# Altium PCB Top-Board_V1.pcbdoc
Units mm, origin at the board's own origin, x right, y up, seen from the top; angles counter-clockwise.
Board outline 90.4 x 70.9 mm, 2 copper layers (Top Layer, Bottom Layer); 20 components, 39 nets, 122 pads, 11 vias.
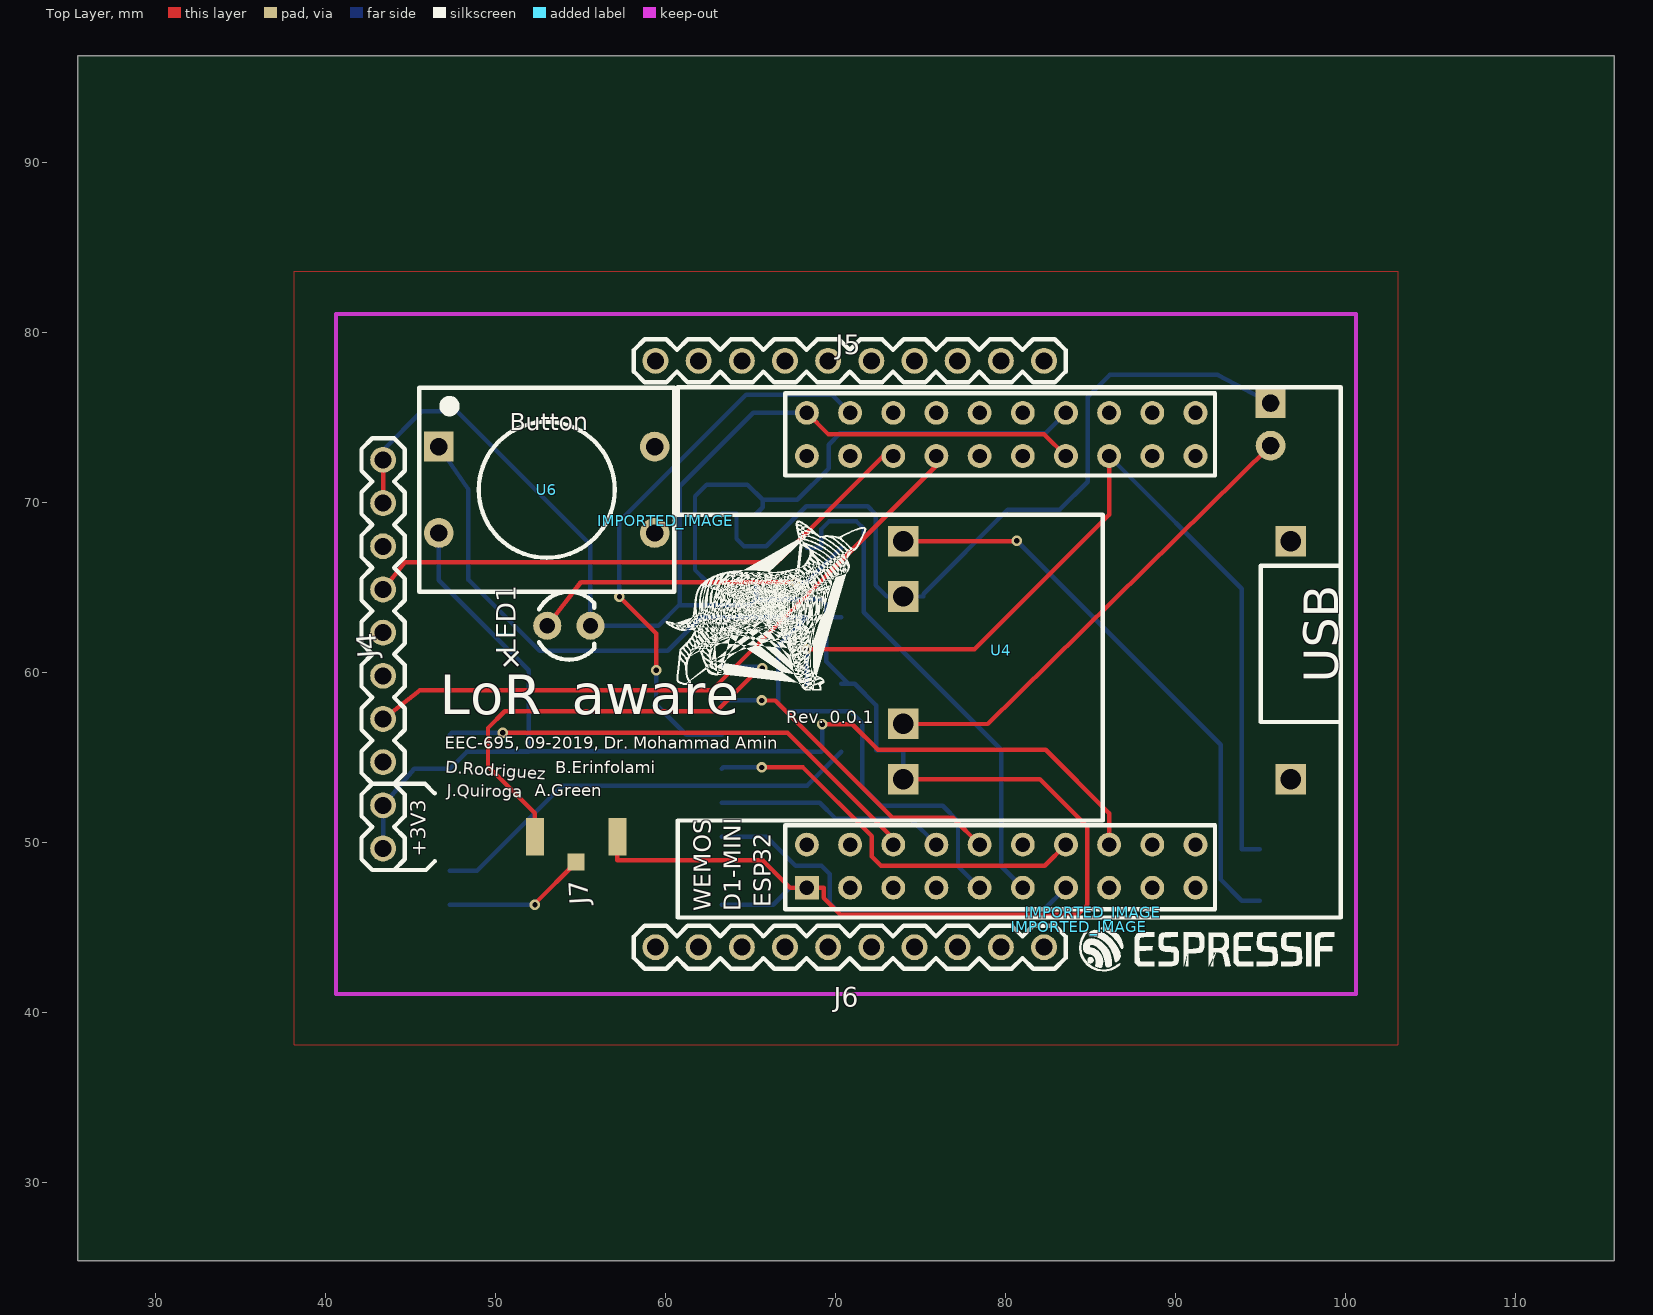
[diagram p0: Top Layer view]
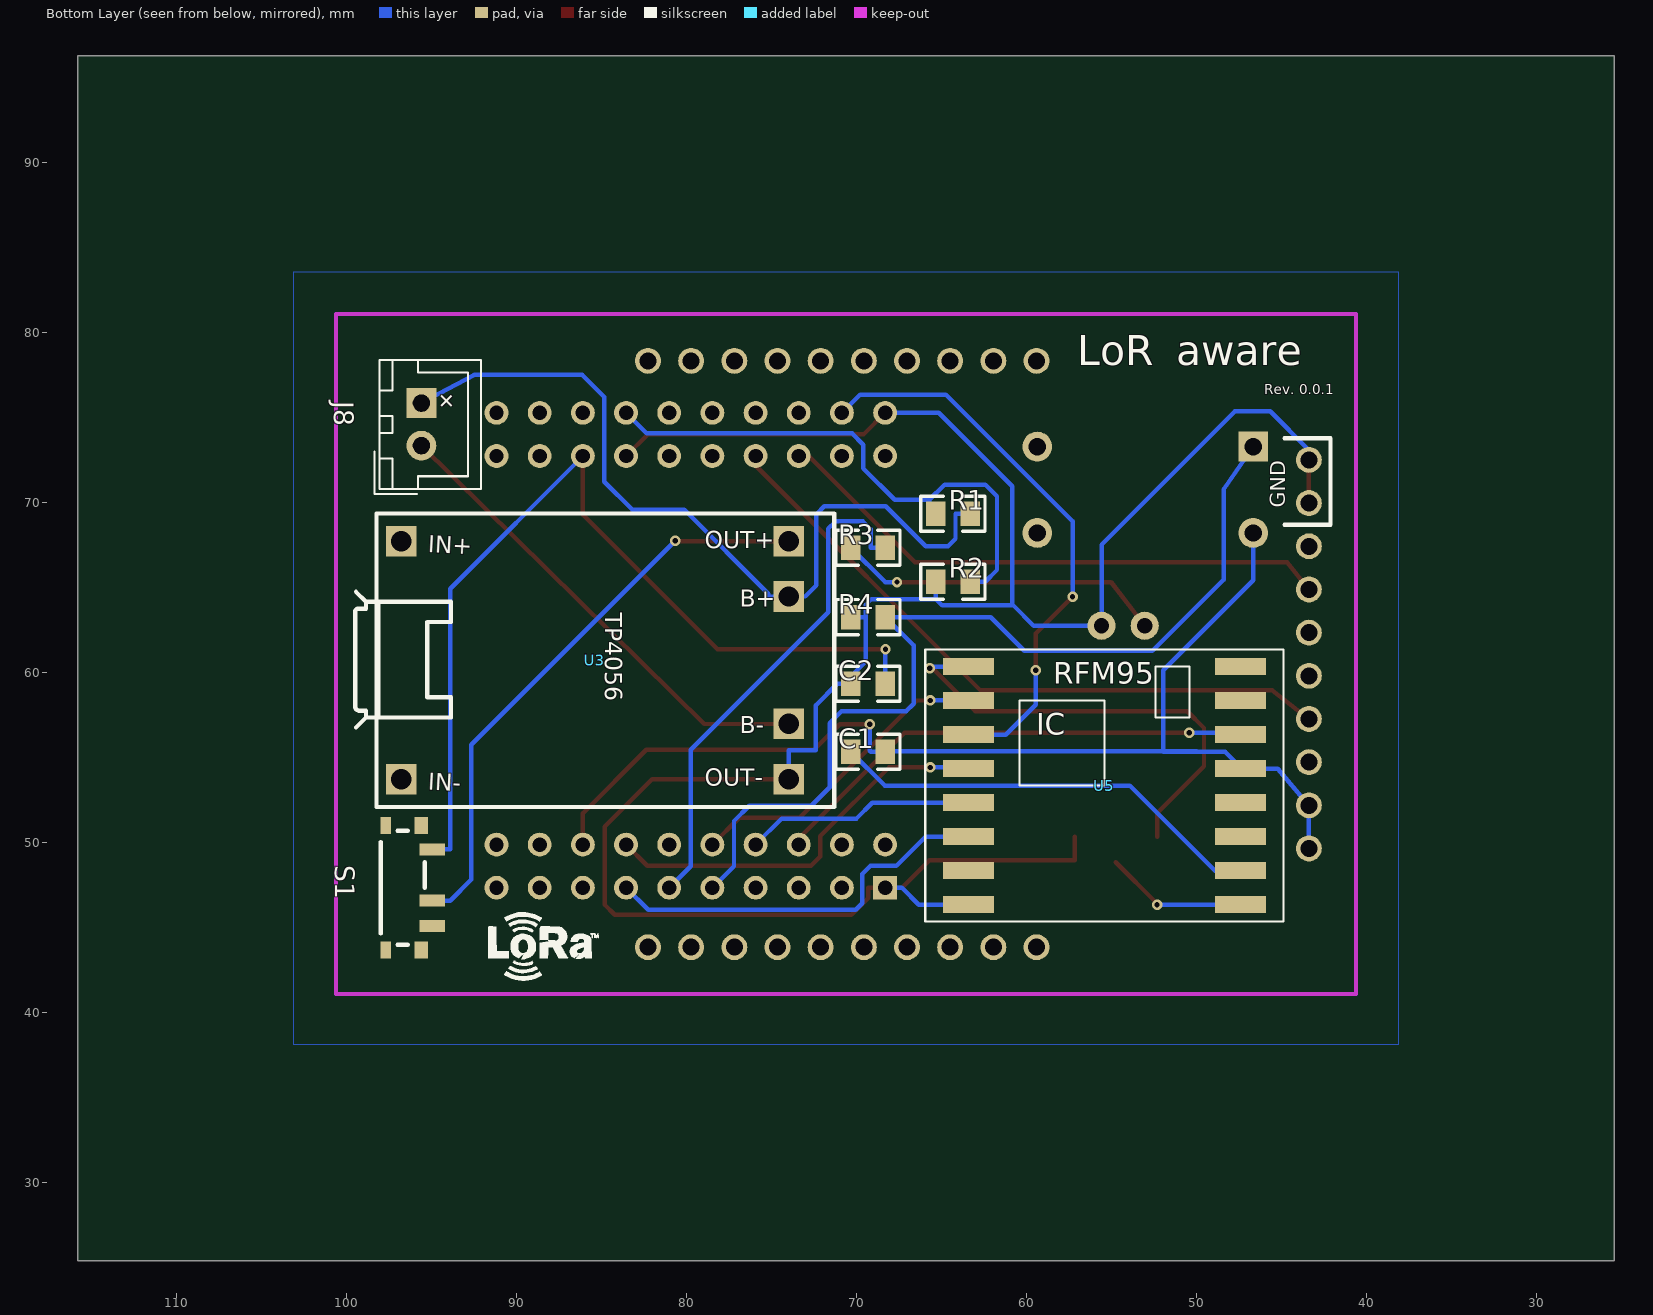
[diagram p1: Bottom Layer view, seen from below]

## Layer stack, top to bottom
Top Layer: signal copper (thickness not stored)
Dielectric: dielectric 0.32, FR-4, Dk 4.8
Bottom Layer: signal copper (thickness not stored)

## Board outline
115.8,25.4 25.4,25.4 25.4,96.3 115.8,96.3

## Components (designator, comment, footprint, x,y, rotation, side; value= is the part's Value field where it differs from the comment)
C1 "0.1u" 0805 69.3,55.35 r0 bottom
C2 "0.1u" 0805 69.3,59.35 r0 bottom
IMPORTED_IMAGE "IMPORTED_IMAGE" IMPORTED_IMAGE 85.151,45.917 r0 top
IMPORTED_IMAGE "IMPORTED_IMAGE" IMPORTED_IMAGE 84.315,45.051 r0 top
IMPORTED_IMAGE "IMPORTED_IMAGE" IMPORTED_IMAGE 60.007,68.949 r0 top
J4 "210S-1*10P L=11.6MMGold-plated black" 210S-1X10P 43.37,61.09 r90 top
J5 "210S-1*10P L=11.6MMGold-plated black" 210S-1X10P 70.82,78.35 r0 top
J6 "210S-1*10P L=11.6MMGold-plated black" 210S-1X10P 70.82,43.85 r0 top
J7 "LTI-IPXSM66AL" LTI-IPXSM66AL 54.725,50.35 r270 top
J8 "jst connector 2 pin" JST_XH_02X2.50MM 95.58,73.36 r270 bottom
LED1 "LED-3MM" LED-3MM/2.54 54.296,62.764 r90 top
R1 "100k" 0805 64.3,69.35 r0 bottom
R2 "100k" 0805 64.3,65.35 r0 bottom
R3 "330" 0805 69.3,67.35 r0 bottom
R4 "10k" 0805 69.3,63.27 r0 bottom
S1 "SWITCH-SPDT-SMD-A" SWITCH-SPST-SMD-A 96.3,47.35 r270 bottom
U3 "TP4056" TP4056 71.3,70.35 r90 bottom
U4 "WEMOS D1 ESP32 Mini HW-665 WROOM-like" "WEMOS D1 ESP32" 68.3,47.35 r90 top
U5 "RFM95" RFM95 55.396,53.363 r0 bottom
U6 "Mom Push Button" MOMENTARY_BUTTON_PACKAGE 45.496,64.763 r0 top

## Footprints (in the part's own frame and the unit in brackets; to place one, negate y for a bottom-side part, rotate by r counter-clockwise, add the part's x,y. Pads: shape width x height; smd on the part's side, far side on the other; paste and mask are expansions set on the pad)
210S-1X10P [mil]
  round 60 hole 39.37: 1(-450.01,0.01) 2(-350.01,0.01) 3(-250.01,0.01) 4(-150.01,0.01) 5(-50.01,0.01) 6(49.99,0.01) 7(149.99,0.01) 8(249.99,0.01) 9(349.99,0.01) 10(449.99,0.01)
  silkscreen extent -500,-50 500,50
0805 [mm]
  rect 1.16x1.45 smd: 1(1.016,0) 2(-1.016,0)
  silkscreen extent -1.87,-1.04 1.9,1.03
IMPORTED_IMAGE [mm]
JST_XH_02X2.50MM [mm]
  rect 1.75x1.75 hole 1 slot 1.005 at 0 deg: 1(-2.5,0)
  round 1.75 hole 1 slot 1.005 at 0 deg: 2(0,0)
  silkscreen extent -5.05,-2.75 2.85,3.5
LED-3MM/2.54 [mil]
  round 65 hole 35.43: 1(0,50) 2(0,-50)
  silkscreen extent -79,-59 79,69
LTI-IPXSM66AL [mm]
  rect 1x1 smd: 1(1.5,0)
  rect 2.2x1.05 smd: 2(0,2.425) 3(0,-2.425)
MOMENTARY_BUTTON_PACKAGE [mm]
  round 1.75 hole 1.02: 1(1.15,3.459) 3(13.85,8.539) 4(13.85,3.459)
  rect 1.75x1.75 hole 1.02: 2(1.151,8.539)
  silkscreen extent 0,0 15,12
RFM95 [mm]
  rect 3x1 smd: P$1(8,-7) P$2(8,-5) P$3(8,-3) P$4(8,-1) P$5(8,1) P$6(8,3) P$7(8,5) P$8(8,7) P$9(-8,7) P$10(-8,5) P$11(-8,3) P$12(-8,1) P$13(-8,-1) P$14(-8,-3) P$15(-8,-5) P$16(-8,-7)
  silkscreen extent -10.54,-8 10.54,8
SWITCH-SPST-SMD-A [mil]
  rect 27.6x59.1 smd: 1(89,54) 2(30,54) 3(-89,54)
  rect 39.4x23.6 smd: GND1(144,-54) GND3(-144,-54)
  rect 39.4x31.5 smd: GND2(144,28) GND4(-144,28)
  silkscreen extent -132,-66 132,36
TP4056 [mm]
  rect 1.8x1.8 hole 1.199: 1(-2.614,2.664) 2(-5.865,2.664) 3(-13.363,2.664) 4(-16.614,2.664) 5(-2.614,25.469) 6(-16.614,25.469)
  silkscreen extent -18.25,0 -0.98,28.18
"WEMOS D1 ESP32" [mil]
  rect 55.1x55.1 hole 33.46: 1(0,0)
  round 55.1 hole 33.46: 2(100,-700) 3(100,0) 4(100,-100) 5(0,-200) 6(0,-500) 7(0,-300) 8(1100,-300) 9(0,-400) 10(1100,-200) 11(100,-200) 12(1100,-100) 13(0,-600) 14(1100,-400) 15(1000,-600) 16(100,-800) 17(0,-800) 18(100,-900) 19(0,-900) 20(1100,-900) 21(1000,-900) 22(1100,-800) 23(1000,-800) 24(1100,-700) 25(1100,-600) 26(1100,-500) 27(1000,-500) 28(1000,-400) 29(100,-600) 30(100,-300) 31(100,-400) 32(0,-100) 33(1000,-300) 34(1000,-100) 35(1000,0) 36(1000,-200) 37(100,-500) 38(1100,0) 40(0,-700) 100(1000,-700)
  silkscreen extent -50,-945 1145,50

## Via types
v1: diameter 0.61, hole 0.31, Top Layer to Bottom Layer, 11 vias

## Nets (pads, with @x,y where several pads share a name; then routed paths per layer and width w, separated by ;. In a path a pad name is that pad's centre, name@x,y a point inside that pad or via, vN(x,y) a via of type N, cw(c..) or ccw(c..) an arc to the next point about the centre after c; other vN are vias at no path point)
ANT: J7.1 U5.P$9 | length 8.5
  Top Layer w0.26: v1(52.3,46.35) 52.3,46.425 J7.1@54.726,48.851
  Bottom Layer w0.26: U5.P$9@47.299,46.349 52.299,46.349 v1(52.3,46.35)
ANT_GND: J7.3 U5.P$1 | length 27.2
  Top Layer w0.26: 52.299,51.74 49.541,54.501 49.541,56.749 50.524,57.732 62.985,57.732 v1@65.525,60.272 ; J7.3 52.3,51.741
  Bottom Layer w0.26: U5.P$1@63.301,60.349 65.45,60.349 v1@65.526,60.273
  other v1: 65.68,60.27
BATT+: J8.1 R1.2 U3.2 | length 48.7
  Bottom Layer w0.26: R1.2@63.283,69.351 64.157,69.351 ; 64.156,69.35 64.156,67.884 64.6,67.44 65.901,67.44 68.258,69.797 71.875,69.797 72.34,69.335 72.34,65.144 72.998,64.483 U3.2@74.453,64.483 ; U3.2 74.454,64.484 75.158,64.484 ; 75.167,64.643 80.122,69.599 83.181,69.599 84.819,71.237 84.819,76.221 86.119,77.521 92.462,77.521 J8.1
BATTGND: J8.2 U3.3 | length 28.3
  Top Layer w0.26: U3.3@73.963,56.985 78.946,56.985 J8.2
BREF: R1.1 R2.2 U4.25 | length 32.6
  Bottom Layer w0.26: 62.411,65.349 61.715,66.045 61.715,70.376 62.408,71.067 64.791,71.067 65.695,70.17 67.732,70.17 69.579,72.019 69.579,73.419 70.239,74.079 82.33,74.079 U4.25@83.539,75.288 ; 62.412,65.35 R2.2@63.283,65.35 ; R1.1@65.315,69.351 65.696,69.729 65.696,70.171
CSS: U4.30 U5.P$5 | length 13.6
  Bottom Layer w0.26: U5.P$5@63.3,52.35 69.051,52.35 69.98,51.42 74.387,51.42 U4.30@75.919,49.888
DI0: U4.11 U5.P$14 | length 29.1
  Top Layer w0.26: v1@50.412,56.462 67.158,56.462 73.379,50.242 U4.11@73.379,49.888
  Bottom Layer w0.26: U5.P$14@47.299,56.349 47.413,56.463 v1(50.413,56.463)
GND: C2.1 J4.9 J4.10 J7.2 LED1.2 R2.1 R4.1 U3.4 U4.1 U4.15 U4.38 U5.P$8 | length 140
  Top Layer w0.26: J4.9 J4.10 ; J7.2 57.149,48.957 65.701,48.957 67.309,47.35 U4.1 69.293,47.35 ; U4.38 69.57,74.02 82.27,74.02 U4.15 ; 69.292,47.348 69.292,46.749 70.28,45.761 84.202,45.761 84.801,46.36 84.801,50.94 82.007,53.734 U3.4@73.963,53.734
  Bottom Layer w0.26: J4.10 43.371,73.109 45.639,75.38 47.72,75.38 55.566,67.534 LED1.2 ; LED1.2 59.564,62.764 60.78,63.98 ; U5.P$8@63.3,46.348 66.328,46.348 67.308,47.348 ; 65.314,64.331 64.943,63.96 60.821,63.98 60.826,70.968 65.149,75.288 U4.38@68.299,75.288 ; R2.1@65.315,65.35 65.315,64.332 69.102,64.332 69.443,63.989 69.443,63.27 ; 67.309,47.35 U4.1 ; C2.1@70.316,59.351 70.753,59.351 69.443,60.659 69.443,63.27 ; R4.1@70.316,63.27 69.443,63.27 ; C2.1@70.752,59.35 71.108,59.35 72.383,58.075 72.383,55.441 73.963,55.441 73.963,54.928 ; U3.4 73.964,54.929
LED_SIG: R3.2 U4.6 | length 29.8
  Bottom Layer w0.26: R3.2@68.284,67.349 69.156,67.349 ; 69.155,67.348 69.155,68.456 69.599,68.9 71.22,68.9 71.639,68.481 71.639,63.556 79.729,55.466 79.729,48.618 U4.6@80.999,47.348
MISO: U4.31 U5.P$2 | length 18.7
  Top Layer w0.26: v1@65.525,58.367 66.432,58.367 73.338,51.461 76.886,51.461 U4.31@78.459,49.888
  Bottom Layer w0.26: U5.P$2@63.301,58.35 63.319,58.368 v1@65.526,58.368
  other v1: 65.65,58.37
MOSI: U4.12 U5.P$3 | length 33.4
  Top Layer w0.26: v1(57.271,64.464) 59.43,62.305 v1(59.43,60.146)
  Bottom Layer w0.26: v1@57.27,64.463 57.27,68.911 64.725,76.363 69.764,76.363 U4.12@70.839,75.288 ; v1(59.43,60.146) 59.43,58.114 61.195,56.349 U5.P$3@63.301,56.349
PB: R4.2 U4.9 U6.2 | length 57.9
  Bottom Layer w0.26: U6.2@46.451,72.722 U6.2@46.451,73.89 ; U6.2 48.38,70.79 48.38,65.479 52.571,61.288 60.107,61.288 62.078,63.259 67.41,63.269 ; 67.411,63.27 R4.2@68.284,63.27 ; R4.2 66.62,61.605 66.62,58.179 67.067,57.732 70.867,57.732 71.56,57.039 71.56,53.259 72.64,52.18 76.284,52.18 77.189,51.275 77.189,48.618 U4.9@78.459,47.348
R3_1: LED1.1 R3.1 | length 19.4
  Top Layer w0.26: LED1.1 55.013,65.333 v1(67.596,65.333)
  Bottom Layer w0.26: v1(67.596,65.333) 68.297,65.333 R3.1@70.316,67.349
RFM_RST: U4.13 U5.P$6 | length 23.6
  Bottom Layer w0.26: U5.P$6@63.3,50.348 65.924,50.348 67.633,48.641 69.157,48.641 69.64,48.159 69.64,46.439 70.031,46.048 82.238,46.048 U4.13@83.539,47.348
S1_2: S1.2 U3.1 | length 34.4
  Top Layer w0.26: U3.1 80.608,67.736 v1(80.639,67.766)
  Bottom Layer w0.26: v1@80.638,67.765 92.64,55.766 92.64,47.834 93.884,46.586 ; 93.885,46.588 S1.2@94.929,46.588
S$7: 
S$9: 
S$11: 
S$13: 
S$150: 
S$152: 
S$236: 
S$240: 
S$539: 
S$567: 
S$569: 
S$576: 
S$578: 
S$580: 
S$582: 
S$1132: 
S$1514: 
S$1516: 
SCK: U4.29 U5.P$4 | length 23.9
  Top Layer w0.26: v1@65.525,54.43 68.07,54.43 72.109,50.391 72.109,49.19 72.66,48.641 82.289,48.641 U4.29@83.539,49.888
  Bottom Layer w0.26: U5.P$4@63.301,54.35 63.382,54.431 v1@65.526,54.431
  other v1: 65.65,54.43
SCL: J4.7 U4.36 | length 33.4
  Top Layer w0.26: J4.7 44.637,66.496 66.542,66.496 72.795,72.75 U4.36
SDA: J4.4 U4.33 | length 39.2
  Top Layer w0.26: J4.4@43.36,57.26 45.534,58.957 62.686,58.957 75.993,72.264 U4.33@75.993,72.704
U5_P$10: C1.1 U5.P$10 | length 25.9
  Bottom Layer w0.26: U5.P$10@47.298,48.349 48.891,48.349 53.899,53.361 68.327,53.361 C1.1
V_IN: C2.2 S1.3 U4.100 | length 54
  Top Layer w0.26: v1(68.28,61.38) 78.159,61.379 86.079,69.299 U4.100@86.079,72.748
  Bottom Layer w0.26: v1(68.28,61.38) C2.2@68.284,59.351 ; U4.100@86.079,72.748 93.884,64.935 93.884,49.609 ; 93.885,49.61 S1.3@94.929,49.61
VCC: C1.2 J4.1 J4.2 U4.2 U5.P$13 U6.1 | length 69.3
  Top Layer w0.26: v1@69.208,56.97 70.971,56.97 72.48,55.461 82.358,55.461 86.079,51.74 U4.2@86.079,49.888
  Bottom Layer w0.26: J4.1 J4.2 45.191,54.35 47.299,54.35 48.3,55.351 49.961,55.351 ; U6.1@46.645,68.222 46.64,65.443 51.936,60.145 51.936,55.349 49.96,55.349 ; 49.978,55.38 C1.2@68.299,55.38 ; C1.2@68.284,55.351 69.156,55.351 69.209,55.447 v1(69.209,56.971)
pads on no net: J4.3 J4.5 J4.6 J4.8 J5.1 J5.2 J5.3 J5.4 J5.5 J5.6 J5.7 J5.8 J5.9 J5.10 J6.1 J6.2 J6.3 J6.4 J6.5 J6.6 J6.7 J6.8 J6.9 J6.10 S1.1 S1.GND1 S1.GND2 S1.GND3 S1.GND4 U3.5 U3.6 U4.3 U4.4 U4.5 U4.7 U4.8 U4.10 U4.14 U4.16 U4.17 U4.18 U4.19 U4.20 U4.21 U4.22 U4.23 U4.24 U4.26 U4.27 U4.28 U4.32 U4.34 U4.35 U4.37 U4.40 U5.P$7 U5.P$11 U5.P$12 U5.P$15 U5.P$16 U6.3 U6.4

## Polygon pours and split planes (outlines as drawn)
GND on Bottom Layer (solid): 38.1,83.6 38.1,38.1 103.1,38.1 103.1,83.6 38.1,83.6
GND on Top Layer (solid): 38.1,83.6 38.1,38.1 103.1,38.1 103.1,83.6 38.1,83.6

## Silkscreen, mask and mechanical layers (free items; w line width, h text height)
Top Overlay:
  lines w0.254 net S$539: 95,57.1 95,66.3 99.7,66.3 99.7,57.1 95,57.1
  lines w0.254 net S$576: 42.735,53.47 45.83,53.47 46.4,52.9
  lines w0.254 net S$578: 42.735,48.39 45.89,48.39 46.4,48.9
  lines w0.254 net S$580: 60.699,69.299 85.7,69.299 85.7,51.301 60.699,51.301 60.699,45.601 60.699,45.601
  lines w0.254 net S$582: 60.699,45.601 99.7,45.601 99.7,76.8 60.7,76.8 60.7,69.3
  text "+" at 51.895,60.682 h1.4 r135
  text "USB" at 99.563,59.402 h2.03 r90
  text "LoR" at 46.701,56.801 h4
  text "aware" at 54.463,56.783 h4
  text "Rev. 0.0.1" at 67.082,56.763 h1.25
  text "EEC-695, 09-2019, Dr. Mohammad Amin" at 46.983,55.303 h1.2
  text "D.Rodriguez" at 46.983,53.883 h1.2 r356
  text "B.Erinfolami" at 53.502,53.863 h1.2
  text "J.Quiroga" at 47.102,52.503 h1.2 r359
  text "A.Green" at 52.303,52.483 h1.2
  text "+3V3" at 46.171,49.18 h1.5 r90
Bottom Overlay:
  lines w0.254 net S$1132: 42.101,68.7 42.101,73.8
  lines w0.254 net S$567: 42.101,73.8 44.801,73.8
  lines w0.254 net S$569: 42.101,68.7 44.8,68.7
  text "aware" at 51.16,77.5 h3
  text "LoR" at 57,77.5 h3
  text "Rev. 0.0.1" at 45.981,76.182 h1
  text "GND" at 44.45,69.7 h1.5 r270
Document:
  lines w0.254 net S$1514: 44.1,41.1 44.1,81.1 40.6,81.1 ; 58.66,41.1 58.66,81.1 40.6,81.1 ; 100.6,73.04 40.6,73.04 40.6,81.1 ; 100.6,77.62 40.6,77.62 40.6,81.1
  lines w0.254 net S$1516: 100.6,44.58 40.6,44.58 40.6,41.1 40.6,49.16 100.6,49.16

## Text inside footprints (layer, text, board x,y; h text height)
J8: Bottom Overlay "+" at 93.993,76.703 h1 r135
U3: Bottom Overlay "OUT+" at 78.92,67.31 h1; Bottom Overlay "B+" at 76.852,63.894 h1; Bottom Overlay "B-" at 76.86,56.431 h1; Bottom Overlay "OUT-" at 78.92,53.34 h1; Bottom Overlay "IN+" at 95.207,67.095 h1 r3; Bottom Overlay "IN-" at 95.207,53.125 h1 r3
U4: Top Overlay "D1-MINI" at 64.409,45.953 h1.02 r90; Top Overlay "WEMOS" at 62.631,45.953 h1.02 r90; Top Overlay "ESP32" at 66.187,46.207 h1.02 r90; Document "USB" at 98.653,59.415 h2.03 r90; Document "WEMOS" at 65.216,56.24 h2.03 r90; Document "D1 MINI" at 68.137,56.494 h2.03 r90; Document "HW-665" at 74.614,55.224 h2.03 r90; Document "ESP32" at 71.221,56.494 h2.03 r90
U5: Bottom Overlay "IC" at 59.396,56.363 h1.27
U6: Top Overlay "Button" at 50.82,74.26 h1